# EAGLE board fader_panel (EAGLE 9.6.2)

Size 20 x 128.5 mm. Coordinates in mm from the lower left corner, seen from the top.
Outline: 0,0 20,0 20,128.5 0,128.5 0,0
Copper layers (1*16): Top 0.035mm / dielectric 1.6mm / Bottom 0.035mm
Design rules "jlcpcb-2layers": minimum track width 5mil, minimum drill 0.3mm, track to track 5mil, track to pad 5mil, pad to pad 5mil, via to via 5mil, smd to smd 5mil, copper to edge 0.2mm, drill to drill 6mil, minimum pad ring 10mil, minimum via ring 3mil, stop-mask expansion 4mil, vias tented up to drill 0mil, thermal gap 10mil
Holes 3.2 mm at 3,13 7.5,3 7.5,125.5
Holes 6 mm at 12,92 12,102 12,112 12,79.5
Holes 3 mm at 3.5,79.5
Milling: area 10.8,15.7 to 13.2,67.5

## Footprints (pad centres in the part's own frame; a part is rotated, then mirrored left to right if it is on the bottom)
F4505-N0SC2B10K = drill 1.2 pad 1.8: 1 0,1.75; 2 0,-1.75; 3 58.8,1.75 | drill 1.7 pad 2.55: MH1 5.5,4.25; MH2 4.3,-4.25; MH3 53.3,4.25; MH4 54.5,-4.25

## Placement (x,y rotation side)
VR1  F4505-N0SC2B10K  [F4505-N0SC2B10K]  12,71 270 top

## Library data of the parts
VR1 = custom_parts

## Nets
FADER_1: VR1.2
N$1: VR1.1
N$2: VR1.3

## Text on the board
tPlace: 0V - 5V | -5V - 5V | noise monolith